# Altium PCB 双595.pcbdoc
Units mm, origin at the board's own origin, x right, y up, seen from the top; angles counter-clockwise.
Board outline 63.68 x 52.25 mm, 2 copper layers (Top Layer, Bottom Layer); 38 components, 0 nets, 171 pads, 61 vias.
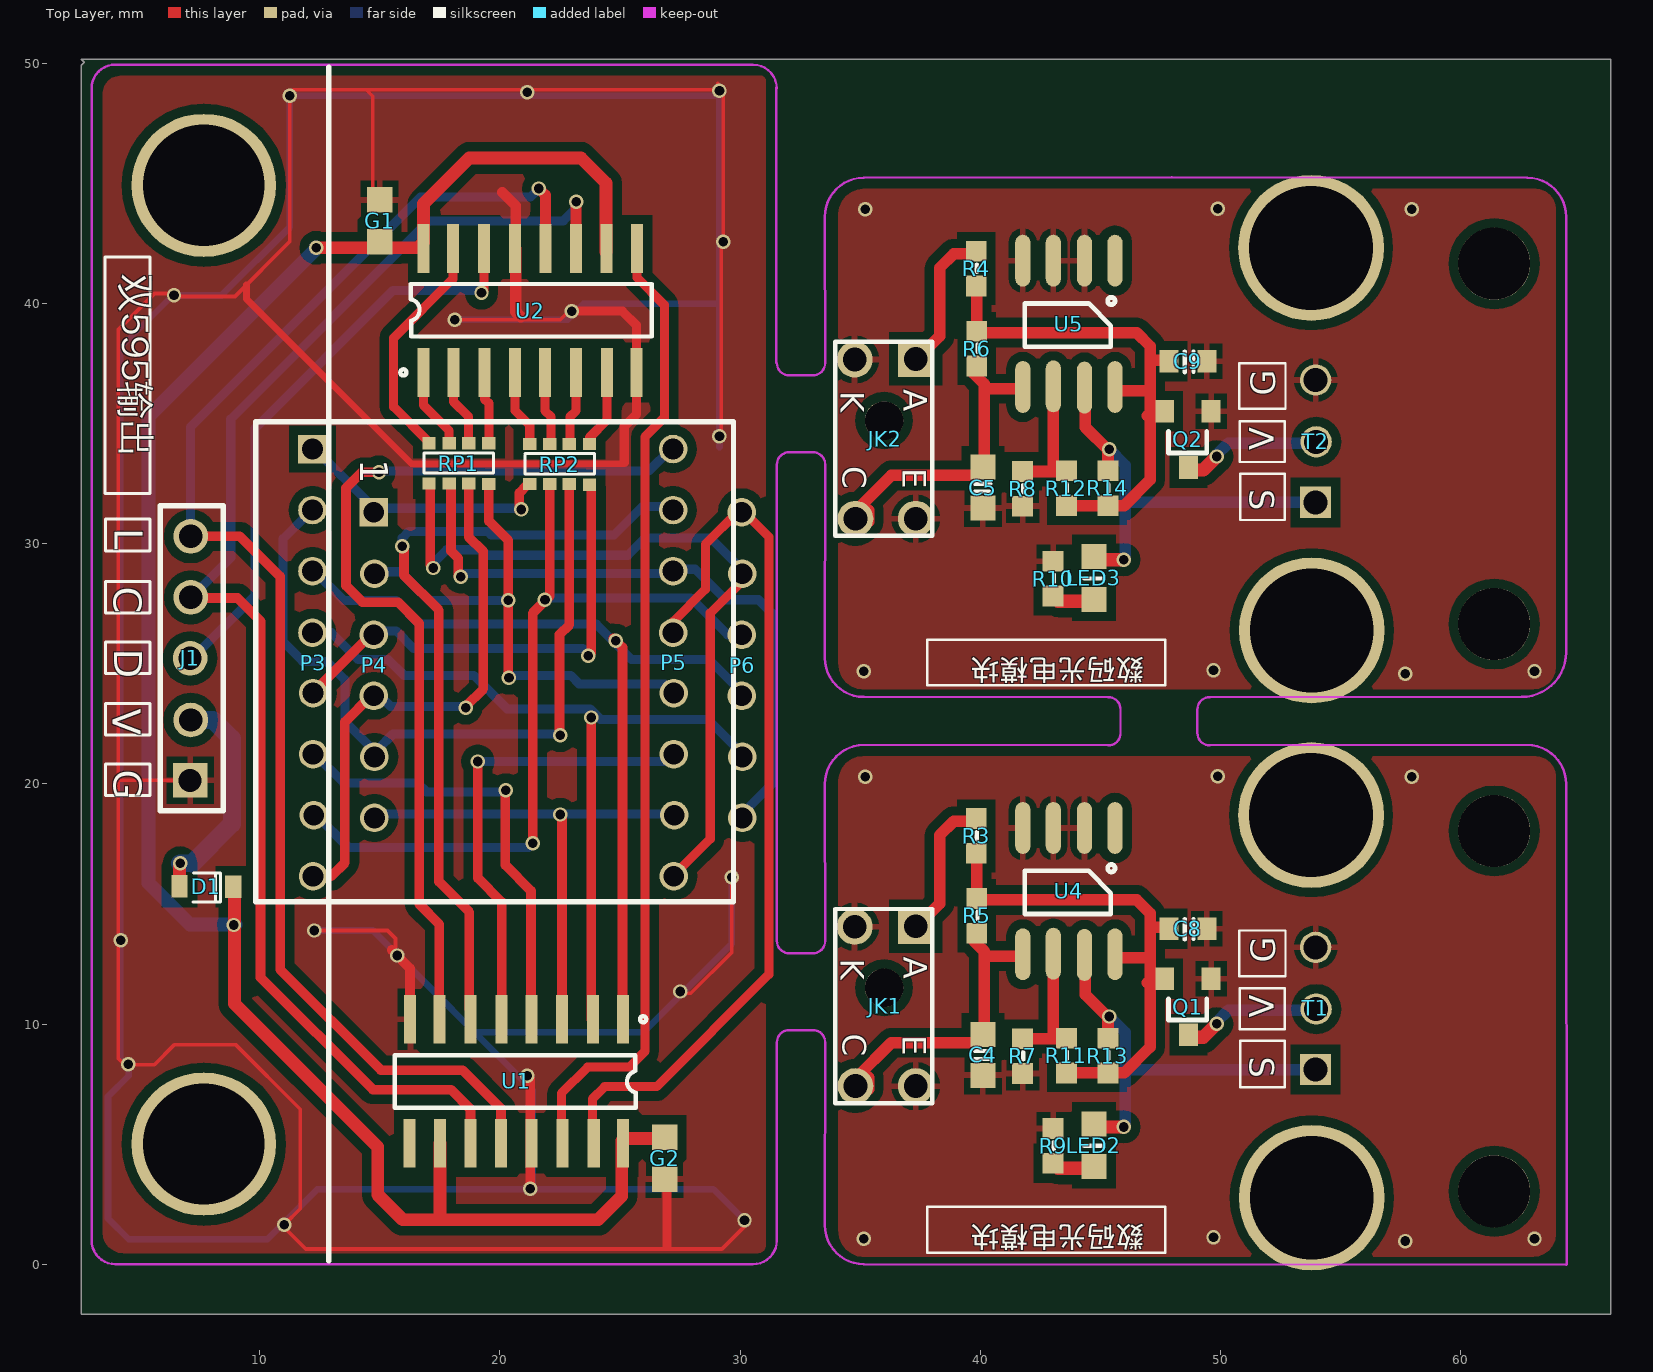
[diagram p0: Top Layer view]
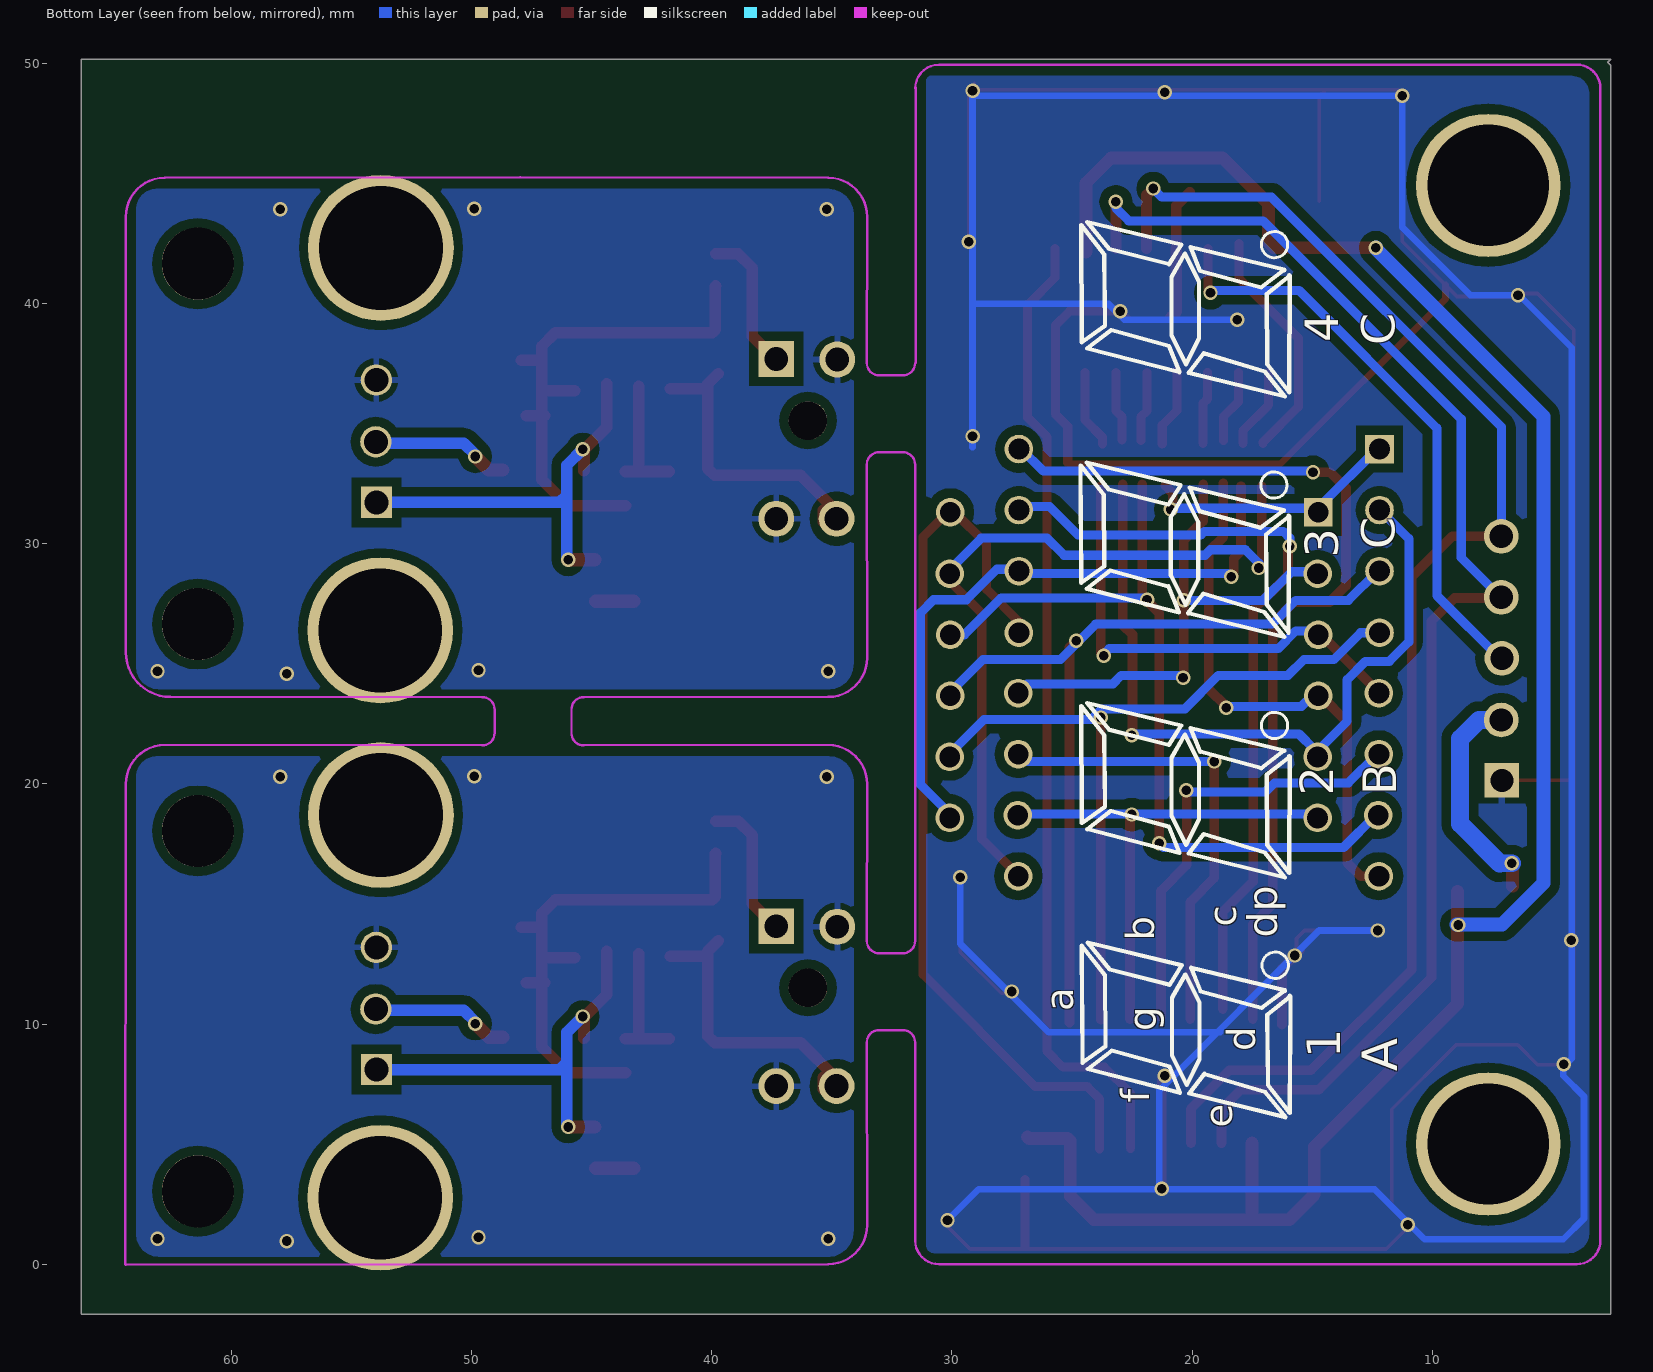
[diagram p1: Bottom Layer view, seen from below]

## Layer stack, top to bottom
Top Layer: signal copper 0.0356
Dielectric: dielectric 0.32, FR-4, Dk 4.8
Bottom Layer: signal copper 0.0356

## Board outline
2.565,50.165 66.243,50.165 66.243,-2.083 2.565,-2.083 2.565,49.911 2.692,50.038
cut-out: 31.474,48.946 cw(c31.524,48.946) 31.474,48.946 cw(c31.524,48.946) 31.474,48.947 cw(c30.534,48.946)
cut-out: 31.474,48.946 cw(c31.524,48.946) 31.474,48.946 cw(c31.524,48.946) 31.474,48.947 cw(c30.534,48.946)

## Design rules (kind name [scope] priority, off if disabled: settings)
Clearance [All] p1: gap=0.254
PolygonConnect [All] p1: connectstyle=Relief reliefconductorwidth=0.254 reliefentries=4 polygonreliefangle="90 Angle" airgapwidth=0.254
RoutingVias [All] p1: holewidth=0.711 width=1.27 viastyle="Through Hole" minholewidth=0.711 minwidth=1.27 maxholewidth=0.711 maxwidth=1.27
SolderMaskExpansion [All] p1: expansion=0.102
Width [All] p1: maxlimit=0.254 minlimit=0.254 preferedwidth=0.254
28 further rules are at their usual default settings.

## Components (designator, comment, footprint, x,y, rotation, side; value= is the part's Value field where it differs from the comment)
C4 "104" COMPONENT_4#1 40.103,8.712 r270 top
C5 "104" COMPONENT_4#1 40.103,32.328 r270 top
C8 "105" COMPONENT_5#1 48.637,13.97 r90 top
C9 "105" COMPONENT_5#1 48.637,37.585 r90 top
D1 "S4" COMPONENT_6#1 7.775,15.723 r0 top
G1 "104" COMPONENT_5#2 14.989,43.434 r180 top
G2 "104" COMPONENT_5#2 26.851,4.42 r180 top
J1 "2.54排针5P黑色" COMPONENT_1#1 7.115,25.222 r0 top
JK1 "ITR20403红外线对射式光电开关" COMPONENT_1#2 36.039,10.744 r90 top
JK2 "ITR20403红外线对射式光电开关" COMPONENT_1#2 36.039,34.36 r90 top
LED2 "LED蓝" COMPONENT_2#1 44.726,4.953 r90 top
LED3 "LED蓝" COMPONENT_2#1 44.726,28.568 r90 top
P3 "8P圆孔排母DS18B20" COMPONENT_2#2 12.22,25.044 r0 top
P4 "6P圆孔排母DS18B20" COMPONENT_3#1 14.76,24.943 r0 top
P5 "8P圆孔排母DS18B20" COMPONENT_2#3 27.232,25.044 r0 top
P6 "6P圆孔排母DS18B20" COMPONENT_3#2 30.076,24.943 r0 top
Q1 "662K" COMPONENT_6#2 48.637,10.719 r90 top
Q2 "662K" COMPONENT_6#2 48.637,34.334 r90 top
R3 "100R" COMPONENT_3#3 39.823,17.831 r90 top
R4 "100R" COMPONENT_3#3 39.823,41.446 r90 top
R5 "10K" COMPONENT_3#3 39.849,14.503 r90 top
R6 "10K" COMPONENT_3#3 39.849,38.119 r90 top
R7 "10K" COMPONENT_3#3 41.754,8.661 r90 top
R8 "10K" COMPONENT_3#3 41.754,32.277 r90 top
R9 "150R" COMPONENT_3#3 43.024,4.928 r90 top
R10 "150R" COMPONENT_3#3 43.024,28.543 r90 top
R11 "10K" COMPONENT_3#3 43.583,8.687 r90 top
R12 "10K" COMPONENT_3#3 43.583,32.302 r90 top
R13 "10K" COMPONENT_3#3 45.31,8.687 r90 top
R14 "10K" COMPONENT_3#3 45.31,32.302 r90 top
RP1 "220R" COMPONENT_7#1 18.291,33.325 r0 top
RP2 "220R" COMPONENT_7#1 22.482,33.299 r0 top
T1 "弯针连接器KF2510-3P白色" 21 53.946,8.103 r0 top
T2 "弯针连接器KF2510-3P白色" 21 53.946,31.718 r0 top
U1 "74FC595D" COMPONENT_4#2 20.678,7.62 r180 top
U2 "74FC595D" COMPONENT_4#2 21.263,39.7 r0 top
U4 "LM358" COMPONENT_7#2 43.684,15.519 r90 top
U5 "LM358" COMPONENT_7#2 43.684,39.135 r90 top

## Footprints (in the part's own frame and the unit in brackets; to place one, negate y for a bottom-side part, rotate by r counter-clockwise, add the part's x,y. Pads: shape width x height; smd on the part's side, far side on the other; paste and mask are expansions set on the pad)
21 [mm]
  rect 1.3x1.3 hole 1: 1(0,0)
  round 1.3 hole 1: 2(0.031,2.519) 3(0.01,5.09)
COMPONENT_1#1 [mil]
  rect 56.84x56.84 hole 38: 1(-0.5,-200)
  round 56.84 hole 38: 2(0.5,-101) 3(-0.5,0) 4(0.5,100) 5(0.5,200)
  silkscreen extent -50,-250 54,250
COMPONENT_1#2 [mil]
  rect 58.84x58.84 hole 39: 1(131,-50)
  round 58.84 hole 39: 2(130,50) 3(-131,49) 4(-131,-50)
  round 63 hole 63: 5(30,2)
  silkscreen extent -159,-77 159,82
COMPONENT_2#1 [mil]
  rect 41x41 smd: 1(35,0) 2(-35,0)
  silkscreen extent -1,-13 -1,16
COMPONENT_2#2 [mil]
  rect 46.84x46.84 hole 34: 1(-1,350)
  round 46.84 hole 34: 2(-1,250) 3(-1,150) 4(-1,49) 5(0,-50) 6(0,-150) 7(1,-250) 8(0,-350)
COMPONENT_2#3 [mil]
  round 46.84 hole 34: 1(-1,350) 2(-1,250) 3(-1,150) 4(-1,49) 5(0,-50) 6(0,-150) 7(1,-250) 8(0,-350)
COMPONENT_3#1 [mil]
  rect 46.84x46.84 hole 34: 1(-0.5,250.5)
  round 46.84 hole 34: 2(0.5,149.5) 3(-0.5,49.5) 4(-0.5,-50.5) 5(0.5,-150.5) 6(0.5,-250.5)
COMPONENT_3#2 [mil]
  round 46.84 hole 34: 1(-0.5,250.5) 2(0.5,149.5) 3(-0.5,49.5) 4(-0.5,-50.5) 5(0.5,-150.5) 6(0.5,-250.5)
COMPONENT_3#3 [mil]
  rect 34x34 smd: 1(-28.5,0) 2(28.5,0)
  silkscreen extent -6,-1 6,-1
COMPONENT_4#1 [mil]
  rect 41x41 smd: 1(33.5,0) 2(-33.5,0)
  silkscreen extent -6,-13 7,12
COMPONENT_4#2 [mil]
  rect 19.84x79.84 smd: 1(-175,-101.5) 2(-126,-101.5) 3(-75,-101.5) 4(-25,-101.5) 5(24,-101.5) 6(75,-101.5) 7(126,-101.5) 8(174,-101.5) 9(175,101.5) 10(125,101.5) 11(75,101.5) 12(25,101.5) 13(-25,101.5) 14(-76,101.5) 15(-127,101.5) 16(-175,101.5)
  silkscreen extent -213,-107 199,44
COMPONENT_5#1 [mil]
  rect 37x31 smd: 1(0,31) 2(0,-31)
  silkscreen extent -18,-9 16,5
COMPONENT_5#2 [mil]
  rect 41.84x41.84 smd: 1(0,34.5) 2(0,-34.5)
COMPONENT_6#1 [mil]
  rect 26.84x36.84 smd: 1(-44,0.5) 2(44,-0.5)
  silkscreen extent -22,-26 23,22
COMPONENT_6#2 [mil]
  rect 37x31 smd: 1(46,-38) 2(46,38) 3(-46,-1)
  silkscreen extent -22,-31 13,32
COMPONENT_7#1 [mil]
  rect 21.84x19.84 smd: 1(-49,33.5) 2(-49,-32.5) 3(-16,33.5) 4(-16,-32.5) 5(16,33.5) 6(16,-32.5) 7(49,33.5) 8(49,-33.5)
  silkscreen extent -57,-16 57,18
COMPONENT_7#2 [mil]
  oval 85x25 smd: 1(104,-75.5) 2(104,-25.5) 3(104,25.5) 4(104,75.5) 5(-103,75.5) 6(-102,25.5) 7(-104,-25.5) 8(-103,-75.5)
  silkscreen extent -37,-76 44,72

## Free pads (board coordinates)
  round 6.071 hole 5.156: 1(53.768,18.694) 1(53.768,42.31) 2(53.793,2.769) 2(53.793,26.384)
  oval 6.016x5.965 hole 5.055: 9(7.674,44.907) 10(7.674,5.004)
  round 3 hole 3 mask+0.102: 13(61.385,3.035) 13(61.385,26.651) 14(61.385,18.035) 14(61.385,41.651)

## Via types
v1: diameter 0.6, hole 0.4, Top Layer to Bottom Layer, tented both sides, 61 vias

## Nets (pads, with @x,y where several pads share a name; then routed paths per layer and width w, separated by ;. In a path a pad name is that pad's centre, name@x,y a point inside that pad or via, vN(x,y) a via of type N, cw(c..) or ccw(c..) an arc to the next point about the centre after c; other vN are vias at no path point)
pads on no net: C4.1 C4.2 C5.1 C5.2 C8.1 C8.2 C9.1 C9.2 D1.1 D1.2 G1.1 G1.2 G2.1 G2.2 J1.1 J1.2 J1.3 J1.4 J1.5 JK1.1 JK1.2 JK1.3 JK1.4 JK1.5 JK2.1 JK2.2 JK2.3 JK2.4 JK2.5 LED2.1 LED2.2 LED3.1 LED3.2 P3.1 P3.2 P3.3 P3.4 P3.5 P3.6 P3.7 P3.8 P4.1 P4.2 P4.3 P4.4 P4.5 P4.6 P5.1 P5.2 P5.3 P5.4 P5.5 P5.6 P5.7 P5.8 P6.1 P6.2 P6.3 P6.4 P6.5 P6.6 Q1.1 Q1.2 Q1.3 Q2.1 Q2.2 Q2.3 R3.1 R3.2 R4.1 R4.2 R5.1 R5.2 R6.1 R6.2 R7.1 R7.2 R8.1 R8.2 R9.1 R9.2 R10.1 R10.2 R11.1 R11.2 R12.1 R12.2 R13.1 R13.2 R14.1 R14.2 RP1.1 RP1.2 RP1.3 RP1.4 RP1.5 RP1.6 RP1.7 RP1.8 RP2.1 RP2.2 RP2.3 RP2.4 RP2.5 RP2.6 RP2.7 RP2.8 T1.1 T1.2 T1.3 T2.1 T2.2 T2.3 U1.1 U1.2 U1.3 U1.4 U1.5 U1.6 U1.7 U1.8 U1.9 U1.10 U1.11 U1.12 U1.13 U1.14 U1.15 U1.16 U2.1 U2.2 U2.3 U2.4 U2.5 U2.6 U2.7 U2.8 U2.9 U2.10 U2.11 U2.12 U2.13 U2.14 U2.15 U2.16 U4.1 U4.2 U4.3 U4.4 U4.5 U4.6 U4.7 U4.8 U5.1 U5.2 U5.3 U5.4 U5.5 U5.6 U5.7 U5.8
copper on no net: | length 1220.3
  Top Layer w0.151: 4.143,20.142 7.102,20.142 ; v1@6.353,40.284 8.969,40.284 11.255,42.57 v1(11.255,48.641) ; v1@6.404,40.411 5.616,40.411 4.118,38.913 4.118,8.56 4.372,8.306 5.616,8.306 6.454,9.144 8.994,9.144 11.687,6.452 11.687,2.311 v1(11.026,1.651) ; v1@11.026,1.524 11.915,0.635 29.238,0.635 30.178,1.575 v1(30.178,1.829) ; v1@11.179,48.666 11.407,48.895 v1@29.06,48.895 ; v1(12.271,13.894) 15.319,13.894 15.649,13.564 v1@15.649,12.903 ; 14.43,48.895 14.709,48.616 14.709,44.247 ; v1(18.113,39.319) 22.507,39.319 v1@22.914,39.726 ; v1@27.435,11.278 27.943,11.278 29.645,12.979 v1(29.645,16.104) ; 29.06,49.149 29.289,48.92 v1(29.289,42.57) ; v1@29.213,34.569 v1@29.213,42.697
  Top Layer w0.278: 9.452,40.767 9.452,40.183 16.31,33.325 25.123,33.325 25.174,33.376
  Top Layer w0.379: 16.818,37.122 16.818,35.763 17.884,34.696 17.884,34.176 ; 17.046,34.176 17.046,34.214 15.573,35.687 15.573,38.557 18.037,41.021 18.037,42.494 ; 18.062,37.122 18.062,35.916 18.697,35.281 18.697,34.29 ; v1(19.231,40.437) 19.332,40.538 19.332,42.278 ; 19.358,37.122 19.358,36.017 19.535,35.839 19.535,34.176 ; 20.628,37.211 20.628,35.535 21.237,34.925 21.237,34.15 ; 21.872,37.122 21.872,35.535 22.126,35.281 22.126,34.29 ; 22.558,4.826 22.558,7.112 23.65,8.204 25.377,8.204 26.038,8.865 26.038,34.442 26.851,35.255 26.851,39.929 25.708,41.072 25.708,42.278 ; 22.914,34.315 22.914,35.281 23.168,35.535 23.168,37.122 ; v1(22.99,39.675) 25.098,39.675 25.682,39.091 25.682,35.382 25.174,34.874 25.174,33.376 ; 23.726,34.15 23.726,34.417 24.463,35.154 24.463,37.122 ; 23.853,4.801 23.853,6.883 24.361,7.391 26.52,7.391 31.194,12.065 31.194,30.277 30.165,31.305 ; 26.952,0.787 26.952,1.118 ; 26.952,0.94 26.952,3.531 ; 27.155,16.104 28.756,17.704 28.756,27.102 30.089,28.435 30.089,28.74 ; 27.206,26.289 27.206,26.746 28.552,28.092 28.552,29.972 29.886,31.305
  Top Layer w0.405: 7.115,27.686 7.166,27.737 9.071,27.737 10.036,26.772 10.036,11.938 14.709,7.264 17.961,7.264 18.773,6.452 18.773,5.042 ; 7.42,30.302 9.172,30.302 10.849,28.626 10.849,12.268 15.04,8.077 18.443,8.077 20.043,6.477 20.043,5.042 ; 12.22,16.154 12.982,16.154 13.541,16.713 13.541,22.581 14.621,23.66 14.748,23.66 ; 12.22,23.774 12.22,23.8 14.633,26.213 ; v1(14.963,32.969) 14.252,32.969 13.592,32.309 13.592,28.245 14.278,27.559 15.751,27.559 16.64,26.67 16.64,14.986 17.478,14.148 17.478,10.198 ; 15.497,13.081 16.259,12.319 16.259,9.982 ; v1@15.929,29.972 16.005,29.896 16.005,28.677 17.453,27.229 17.453,15.926 18.723,14.656 18.723,10.617 ; 17.097,32.385 17.097,29.108 v1(17.224,28.981) ; 17.961,32.385 17.961,29.693 18.265,29.388 v1@18.265,28.651 ; v1(18.57,23.165) 18.57,23.216 19.307,23.952 19.307,29.667 18.697,30.277 18.697,32.499 ; v1@19.078,21.006 19.078,16.078 20.069,15.088 20.069,10.198 ; 19.535,32.474 19.535,30.937 20.348,30.124 v1@20.348,24.46 ; v1@20.221,19.812 20.221,16.612 21.288,15.545 21.288,10.287 ; v1@20.805,31.394 20.805,32.106 21.11,32.41 ; v1(21.136,7.849) 21.263,7.722 v1(21.263,3.15) ; v1(21.364,17.526) 21.364,27.102 22.075,27.813 22.075,32.474 ; v1@22.482,22.047 22.482,26.213 22.888,26.619 22.888,32.474 ; v1(22.507,18.72) 22.583,18.644 22.583,10.198 ; v1(23.676,25.324) 23.803,25.451 23.803,32.372 ; 23.803,10.185 v1(23.803,22.758) ; v1@24.717,26.06 25.098,25.679 25.098,10.058
  Top Layer w0.43: 20.094,44.628 20.653,44.069 20.653,42.164
  Top Layer w0.456: v1(21.618,44.78) 21.898,44.501 21.898,42.278 ; 23.168,42.278 v1@23.168,44.145
  Top Layer w0.481: 20.653,42.266 20.653,39.649 20.856,39.446 ; 34.845,7.772 36.293,9.22 39.874,9.22 40.154,9.5 40.154,13.03 39.722,13.462 ; 34.845,31.388 36.293,32.836 39.874,32.836 40.154,33.115 40.154,36.646 39.722,37.077 ; 35.353,7.29 35.353,7.772 ; 35.353,30.905 35.353,31.388 ; 37.309,14.072 37.36,14.072 38.299,15.011 38.299,17.856 38.884,18.44 39.823,18.44 ; 37.309,37.687 37.36,37.687 38.299,38.627 38.299,41.472 38.884,42.056 39.823,42.056 ; 39.823,17.107 39.849,17.081 39.849,15.291 39.976,15.164 46.504,15.164 47.062,14.605 47.062,9.042 45.983,7.963 43.583,7.963 ; 39.823,40.722 39.849,40.697 39.849,38.906 39.976,38.779 46.504,38.779 47.062,38.22 47.062,32.658 45.983,31.578 43.583,31.578 ; 40.331,12.827 41.728,12.827 ; 40.331,36.442 41.728,36.442 ; 41.754,9.385 43.595,9.385 ; 41.754,33.001 43.595,33.001 ; 43.037,9.614 43.037,12.929 ; 43.037,33.229 43.037,36.544 ; 44.37,13.03 44.37,11.227 45.31,10.287 45.31,9.411 ; 44.37,36.646 44.37,34.842 45.31,33.902 45.31,33.026 ; 45.691,12.751 46.935,12.751 ; 45.691,36.366 46.935,36.366 ; 46.935,11.709 47.723,11.709 ; 46.935,35.325 47.723,35.325 ; 47.24,14.021 47.926,14.021 ; 47.24,37.636 47.926,37.636
  Top Layer w0.532: 6.658,15.735 v1@6.658,16.662 ; 8.944,15.519 8.944,10.846 14.913,4.877 14.913,2.896 15.954,1.854 24.082,1.854 25.073,2.845 25.073,5.131 25.174,5.232 26.787,5.232 26.851,5.296 ; v1(12.347,42.316) 16.589,42.316 16.818,42.545 16.818,44.145 18.723,46.05 23.371,46.05 24.412,45.009 24.412,42.139 ; 17.503,1.854 17.503,5.042
  Top Layer w0.557: 43.24,3.988 44.827,3.988 ; 43.24,27.603 44.827,27.603 ; 44.853,5.715 v1(45.97,5.715) ; 44.853,29.33 v1(45.97,29.33) ; 48.688,9.449 49.272,9.449 v1(49.831,10.008) ; 48.688,33.064 49.272,33.064 v1(49.831,33.623)
  Bottom Layer w0.278: v1(12.271,13.894) 14.709,13.894 21.364,7.239 v1@21.364,3.124 ; v1(18.113,39.319) 22.812,39.319 23.472,39.98 29.137,39.98 ; 18.824,9.652 25.962,9.652 29.645,13.335 v1(29.645,16.104) ; 29.137,34.011 v1(29.137,48.844) 28.933,48.641 v1(11.255,48.641) 11.255,43.18 8.41,40.335 v1(6.429,40.335) 6.378,40.335 4.194,38.151 4.194,8.56 4.549,8.204 4.549,7.849 3.686,6.985 3.686,1.905 4.549,1.041 10.315,1.041 12.398,3.124 28.883,3.124 v1(30.178,1.829)
  Bottom Layer w0.379: 7.115,25.146 9.807,27.838 9.807,34.798 15.548,40.538 v1@19.129,40.538 ; 7.115,30.226 7.115,34.849 16.691,44.425 21.263,44.425 v1(21.618,44.78) ; 7.14,27.762 8.791,29.413 8.791,35.179 17.046,43.434 22.634,43.434 23.168,43.967 v1@23.168,44.323 ; 12.144,34.061 12.169,34.061 14.76,31.471 v1@20.831,31.471 ; 12.195,28.854 12.271,28.854 13.49,27.635 15.675,27.635 16.665,26.645 24.006,26.645 25.479,25.171 28.705,25.171 30.064,23.812 ; 12.22,21.234 12.296,21.234 13.49,20.041 16.564,20.041 16.945,19.66 v1@20.297,19.66 ; 12.246,18.694 12.347,18.694 13.693,17.348 21.186,17.348 v1(21.364,17.526) ; 12.271,31.445 12.22,31.445 10.976,30.201 10.976,25.908 11.788,25.095 12.779,25.095 13.541,24.333 13.541,22.606 14.913,21.234 14.913,21.438 15.548,22.073 v1@22.558,22.073 ; 12.423,26.289 12.982,26.289 14.1,25.171 15.344,25.171 16.005,24.511 18.9,24.511 20.297,23.114 23.752,23.114 24.184,22.682 28.654,22.682 30.026,21.311 30.026,21.209 ; 14.748,23.66 15.002,23.66 15.446,23.216 v1@18.519,23.216 ; 14.748,26.2 14.913,26.365 15.675,26.365 16.411,25.629 23.447,25.629 v1@23.676,25.4 ; 14.773,18.58 15.103,18.58 15.268,18.745 27.206,18.745 27.257,18.694 ; v1(14.963,32.969) 15.014,33.02 26.19,33.02 27.105,33.934 ; 14.989,28.829 15.852,28.829 17.046,27.635 v1(20.348,27.635) ; v1(15.929,29.896) 15.929,30.226 16.208,30.505 19.485,30.505 19.637,30.353 24.742,30.353 25.936,31.547 27.105,31.547 27.282,31.369 ; v1(17.224,28.981) 17.224,29.185 17.783,29.743 19.231,29.743 19.459,29.515 25.327,29.515 26.038,30.226 28.781,30.226 30.089,28.918 30.089,28.74 ; v1(18.367,28.626) 18.494,28.753 26.876,28.753 27.054,28.931 28.121,28.931 29.391,27.661 30.762,27.661 31.296,27.127 31.296,19.964 30.089,18.758 30.089,18.58 ; v1(19.078,20.93) 26.978,20.93 27.308,21.26 ; v1(20.374,24.409) 20.475,24.511 22.939,24.511 23.295,24.155 26.876,24.155 27.155,23.876 ; v1(21.872,27.661) 21.948,27.737 27.943,27.737 29.48,26.2 30.064,26.2
  Bottom Layer w0.481: v1(45.361,10.312) 46.021,9.652 46.021,8.407 ; v1(45.361,33.928) 46.021,33.267 46.021,32.023 ; v1(45.97,5.715) 46.021,5.766 46.021,8.407 ; v1(45.97,29.33) 46.021,29.381 46.021,32.023 ; v1@49.831,10.084 50.314,10.566 53.922,10.566 ; v1@49.831,33.699 50.314,34.182 53.922,34.182 ; 53.946,8.103 46.326,8.103 46.021,8.407 ; 53.946,31.718 46.326,31.718 46.021,32.023
  Bottom Layer w0.583: v1@8.994,14.148 7.089,14.148 5.362,15.875 5.362,35.281 12.347,42.266 v1(12.347,42.316)
  Bottom Layer w0.735: v1(6.683,16.688) 7.191,16.688
  Bottom Layer w0.76: 7.128,22.657 8.055,22.657 8.842,21.869 8.842,18.339 7.191,16.688
  other v1: 57.68,0.965 35.15,1.067 63.064,1.067 49.704,1.118 4.524,8.331 27.511,11.354 15.725,12.852 4.219,13.487 8.918,14.122 20.247,19.736 35.201,20.295 57.959,20.295 49.882,20.32 22.507,22.022 57.68,24.581 35.15,24.682 63.064,24.682 49.704,24.733 24.819,25.959 20.882,31.42 29.137,34.468 35.201,43.91 57.959,43.91 49.882,43.935 23.168,44.221 21.136,48.793

## Polygon pours and split planes (outlines as drawn)
no net on Top Layer "GND-No Net" (solid, pour order 10): 33.651,1.422 33.651,20.168 cw(c35.074,20.168) 35.074,21.59 63.191,21.59 cw(c63.191,20.396) 64.385,20.396 64.385,1.219 cw(c63.039,1.219) 63.039,-0.127 35.201,-0.127 cw(c35.201,1.422)
no net on Top Layer "GND-No Net" (solid, pour order 8): 33.651,25.038 33.651,43.783 cw(c35.074,43.783) 35.074,45.205 63.191,45.205 cw(c63.191,44.012) 64.385,44.012 64.385,24.835 cw(c63.039,24.835) 63.039,23.488 35.201,23.488 cw(c35.201,25.038)
no net on Top Layer "GND-No Net" (solid, pour order 2): 3,1.321 3,48.819 cw(c4.246,48.691) 4.118,49.936 30.965,49.936 cw(c30.895,49.307) 31.524,49.378 31.524,0.762 cw(c30.74,0.784) 30.762,0 4.321,0 cw(c4.329,1.329)
no net on Bottom Layer "GND-No Net" (solid, pour order 11): 33.651,1.422 33.651,20.168 cw(c35.074,20.168) 35.074,21.59 63.191,21.59 cw(c63.191,20.396) 64.385,20.396 64.385,1.219 cw(c63.039,1.219) 63.039,-0.127 35.201,-0.127 cw(c35.201,1.422)
no net on Bottom Layer "GND-No Net" (solid, pour order 9): 33.651,25.038 33.651,43.783 cw(c35.074,43.783) 35.074,45.205 63.191,45.205 cw(c63.191,44.012) 64.385,44.012 64.385,24.835 cw(c63.039,24.835) 63.039,23.488 35.201,23.488 cw(c35.201,25.038)
no net on Bottom Layer "GND-No Net" (solid, pour order 3): 3,1.321 3,48.819 cw(c4.246,48.691) 4.118,49.936 30.965,49.936 cw(c30.895,49.307) 31.524,49.378 31.524,0.762 cw(c30.74,0.784) 30.762,0 4.321,0 cw(c4.329,1.329)

## Keep-outs
Keep-Out Layer:
  lines w0.1: 31.499,48.971 31.5,37.535 ; 31.524,48.946 ccw(c30.534,48.946) 30.534,49.936 21.506,49.936 3.991,49.936 ; 31.526,33.294 31.528,13.456 ccw(c32.037,13.456) 32.037,12.948 33.027,12.948 ccw(c33.027,13.456) 33.535,13.456 ; 31.529,37.51 ccw(c32.037,37.51) 32.037,37.002 33.027,37.002 ccw(c33.027,37.51) 33.535,37.51 ; 31.53,33.294 cw(c32.038,33.294) 32.038,33.802 33.028,33.802 cw(c33.028,33.294) 33.536,33.294 33.524,25.241 ccw(c35.15,25.241) 35.15,23.615 45.325,23.607 ; 33.533,13.456 33.524,19.99 cw(c35.15,19.99) 35.15,21.615 45.325,21.601 ; 33.533,37.51 33.524,43.605 cw(c35.15,43.605) 35.15,45.231 47.959,45.248 ; 45.325,21.598 ccw(c45.325,22.106) 45.833,22.106 45.833,23.097 ccw(c45.325,23.097) 45.325,23.605 ; 47.959,45.253 62.762,45.231 ; 62.524,23.615 ccw(c62.524,25.476) 64.385,25.476 ; 62.526,23.615 49.541,23.606 ccw(c49.541,23.098) 49.033,23.098 49.033,22.108 ccw(c49.541,22.108) 49.541,21.6 62.76,21.615 cw(c62.76,19.99) 64.385,19.99 64.403,0 ; 64.387,25.476 64.385,43.605 ; 3,48.946 cw(c3.991,48.946) 3.991,49.936 ; 3,48.946 cw(c3.991,48.946) 3.991,49.936 ; 3,48.946 3,48.365 3,1.248 3,0.991 ccw(c3.991,0.991) 3.991,0 30.534,0 ; 30.534,0 ccw(c30.534,0.991) 31.524,0.991 ; 30.534,0 ccw(c30.534,0.991) 31.524,0.991 ; 31.524,0.991 31.53,9.24 cw(c32.038,9.24) 32.038,9.748 33.028,9.748 cw(c33.028,9.24) 33.536,9.24 ; 33.524,1.626 ccw(c35.15,1.626) 35.15,0 ; 33.524,1.626 ccw(c35.15,1.626) 35.15,0 ; 33.524,1.626 33.536,9.24 ; 33.524,1.626 33.536,9.24 ; 35.15,0 64.389,-0.025 35.15,0 ; 64.385,43.605 ccw(c62.76,43.605) 62.76,45.231 cw(c62.76,43.605) 64.385,43.605

## Silkscreen, mask and mechanical layers (free items; w line width, h text height)
Top Overlay:
  lines w0.1: 37.791,0.508 37.791,2.388 47.697,2.388 47.697,0.483 37.791,0.483 37.791,0.838 ; 37.791,24.123 37.791,26.003 47.697,26.003 47.697,24.098 37.791,24.098 37.791,24.454 ; 50.796,9.779 50.796,11.481 52.676,11.481 52.676,9.779 50.822,9.779 ; 50.796,33.394 50.796,35.096 52.676,35.096 52.676,33.394 50.822,33.394 ; 50.771,11.989 52.701,11.989 52.701,13.894 50.771,13.894 50.771,11.989 ; 50.771,35.604 52.701,35.604 52.701,37.509 50.771,37.509 50.771,35.604 ; 50.822,7.366 52.676,7.366 52.676,9.296 50.822,9.296 50.822,7.366 ; 50.822,30.981 52.676,30.981 52.676,32.912 50.822,32.912 50.822,30.981
  lines w0.125: 3.584,20.803 3.584,19.507 5.438,19.507 5.438,20.828 3.584,20.828 ; 3.584,23.317 3.584,22.022 5.438,22.022 5.438,23.343 3.584,23.343 ; 3.584,25.883 3.584,24.587 5.438,24.587 5.438,25.908 3.584,25.908 ; 3.584,28.397 3.584,27.102 5.438,27.102 5.438,28.423 3.584,28.423 ; 3.584,30.988 3.584,29.693 5.438,29.693 5.438,31.013 3.584,31.013 ; 3.559,32.08 3.559,41.935 5.438,41.935 5.438,32.08 3.559,32.08
  lines w0.227: 12.881,0.152 12.881,49.835 ; 9.833,15.088 9.833,35.077 29.721,35.077 29.721,15.088 9.833,15.088
  text "双595输出" at 3.873,41.209 h2 r270
  text "G" at 52.269,36.163 h1.02 r90
  text "V" at 52.219,33.877 h1.02 r90
  text "1" at 14.176,33.503 h1.17 r270
  text "S" at 51.203,32.251 h1.02 r270
  text "L" at 3.965,30.632 h1.17 r270
  text "C" at 3.914,28.194 h1.17 r270
  text "D" at 3.94,25.629 h1.17 r270
  text "数码光电模块" at 46.834,25.464 h1.5 r180
  text "V" at 3.889,23.114 h1.17 r270
  text "G" at 3.914,20.574 h1.17 r270
  text "G" at 52.269,12.548 h1.02 r90
  text "V" at 52.219,10.262 h1.02 r90
  text "S" at 51.203,8.636 h1.02 r270
  text "数码光电模块" at 46.834,1.848 h1.5 r180
Bottom Overlay:
  circle w0.125: c16.538,12.446 r0.548
  circle w0.125: c16.564,22.428 r0.548
  circle w0.125: c16.589,32.436 r0.548
  circle w0.125: c16.564,42.443 r0.548
  lines w0.176: 15.929,11.176 15.903,11.151 ; 15.954,21.158 15.929,21.133 ; 15.954,41.173 15.929,41.148 ; 15.979,31.166 15.954,31.14 ; 16.132,11.379 16.132,11.405 ; 16.157,21.361 16.157,21.387 ; 16.157,41.377 16.157,41.402 ; 16.183,31.369 16.183,31.394 ; 15.903,11.151 16.868,10.389 16.843,7.468 15.929,6.299 15.903,11.151 ; 15.929,21.133 16.894,20.371 16.868,17.45 15.954,16.281 15.929,21.133 ; 15.929,41.148 16.894,40.386 16.868,37.465 15.954,36.297 15.929,41.148 ; 15.954,31.14 16.919,30.378 16.894,27.457 15.979,26.289 15.954,31.14 ; 16.132,11.405 17.097,10.668 19.637,11.354 20.043,12.344 16.132,11.405 ; 16.157,21.387 17.122,20.65 19.662,21.336 20.069,22.327 16.157,21.387 ; 16.157,41.402 17.122,40.665 19.662,41.351 20.069,42.342 16.157,41.402 ; 16.183,31.394 17.148,30.658 19.688,31.344 20.094,32.334 16.183,31.394 ; 16.106,6.121 20.12,7.112 19.485,7.925 16.945,7.163 16.106,6.121 ; 16.132,16.104 20.145,17.094 19.51,17.907 16.97,17.145 16.132,16.104 ; 16.132,36.119 20.145,37.109 19.51,37.922 16.97,37.16 16.132,36.119 ; 16.157,26.111 20.17,27.102 19.535,27.915 16.995,27.153 16.157,26.111 ; 19.688,8.534 20.221,7.468 20.831,8.687 20.831,11.1 20.272,12.065 19.688,10.897 19.688,8.534 ; 19.713,18.517 20.247,17.45 20.856,18.669 20.856,21.082 20.297,22.047 19.713,20.879 19.713,18.517 ; 19.713,38.532 20.247,37.465 20.856,38.684 20.856,41.097 20.297,42.062 19.713,40.894 19.713,38.532 ; 19.739,28.524 20.272,27.457 20.882,28.677 20.882,31.09 20.323,32.055 19.739,30.886 19.739,28.524 ; 20.424,12.446 20.932,11.633 23.422,12.268 24.336,13.386 20.424,12.446 ; 20.45,22.428 20.958,21.615 23.447,22.25 24.361,23.368 20.45,22.428 ; 20.45,42.443 20.958,41.631 23.447,42.266 24.361,43.383 20.45,42.443 ; 20.475,32.436 20.983,31.623 23.472,32.258 24.387,33.376 20.475,32.436 ; 20.501,7.137 20.932,8.23 23.345,8.89 24.336,8.128 20.501,7.137 ; 20.526,17.12 20.958,18.212 23.371,18.872 24.361,18.11 20.526,17.12 ; 20.526,37.135 20.958,38.227 23.371,38.887 24.361,38.125 20.526,37.135 ; 20.551,27.127 20.983,28.219 23.396,28.88 24.387,28.118 20.551,27.127 ; 23.599,9.068 23.625,12.04 24.59,13.259 24.565,8.382 23.599,9.068 ; 23.625,19.05 23.65,22.022 24.615,23.241 24.59,18.364 23.625,19.05 ; 23.625,39.065 23.65,42.037 24.615,43.256 24.59,38.379 23.625,39.065 ; 23.65,29.058 23.676,32.029 24.641,33.249 24.615,28.372 23.65,29.058
  text "4" at 13.922,38.379 h1.4 r270
  text "C" at 11.56,38.252 h1.4 r270
  text "C" at 11.56,29.769 h1.4 r270
  text "3" at 13.922,29.413 h1.4 r270
  text "B" at 11.509,19.533 h1.4 r270
  text "2" at 14.125,19.507 h1.4 r270
  text "c" at 18.164,14.046 h1.17 r270
  text "dp" at 16.462,13.589 h1.24 r270
  text "b" at 21.567,13.462 h1.17 r270
  text "a" at 24.946,10.541 h1.17 r270
  text "g" at 21.491,9.703 h1.17 r270
  text "A" at 11.458,9.398 h1.47 r270
  text "d" at 17.376,8.865 h1.17 r270
  text "1" at 13.82,8.585 h1.4 r270
  text "f" at 21.771,6.731 h1.17 r270
  text "e" at 18.316,5.69 h1.17 r270

## Text inside footprints (layer, text, board x,y; h text height)
JK1: Top Overlay "E" at 36.775,9.525 h0.99 r270; Top Overlay "C" at 34.261,9.601 h0.99 r270; Top Overlay "K" at 34.185,12.725 h0.99 r270; Top Overlay "A" at 36.801,12.802 h0.99 r270
JK2: Top Overlay "E" at 36.775,33.14 h0.99 r270; Top Overlay "C" at 34.261,33.217 h0.99 r270; Top Overlay "K" at 34.185,36.341 h0.99 r270; Top Overlay "A" at 36.801,36.417 h0.99 r270